# Altium PCB CPU-V4e_antenna_2.PcbDoc
Units mil, origin at the board's own origin, x right, y up, seen from the top; angles counter-clockwise.
Board outline 3543.31 x 4821.53 mil, 4 copper layers (TopLayer, MidLayer1, MidLayer2, BottomLayer); 3 components, 96 nets, 40 pads, 3 vias.
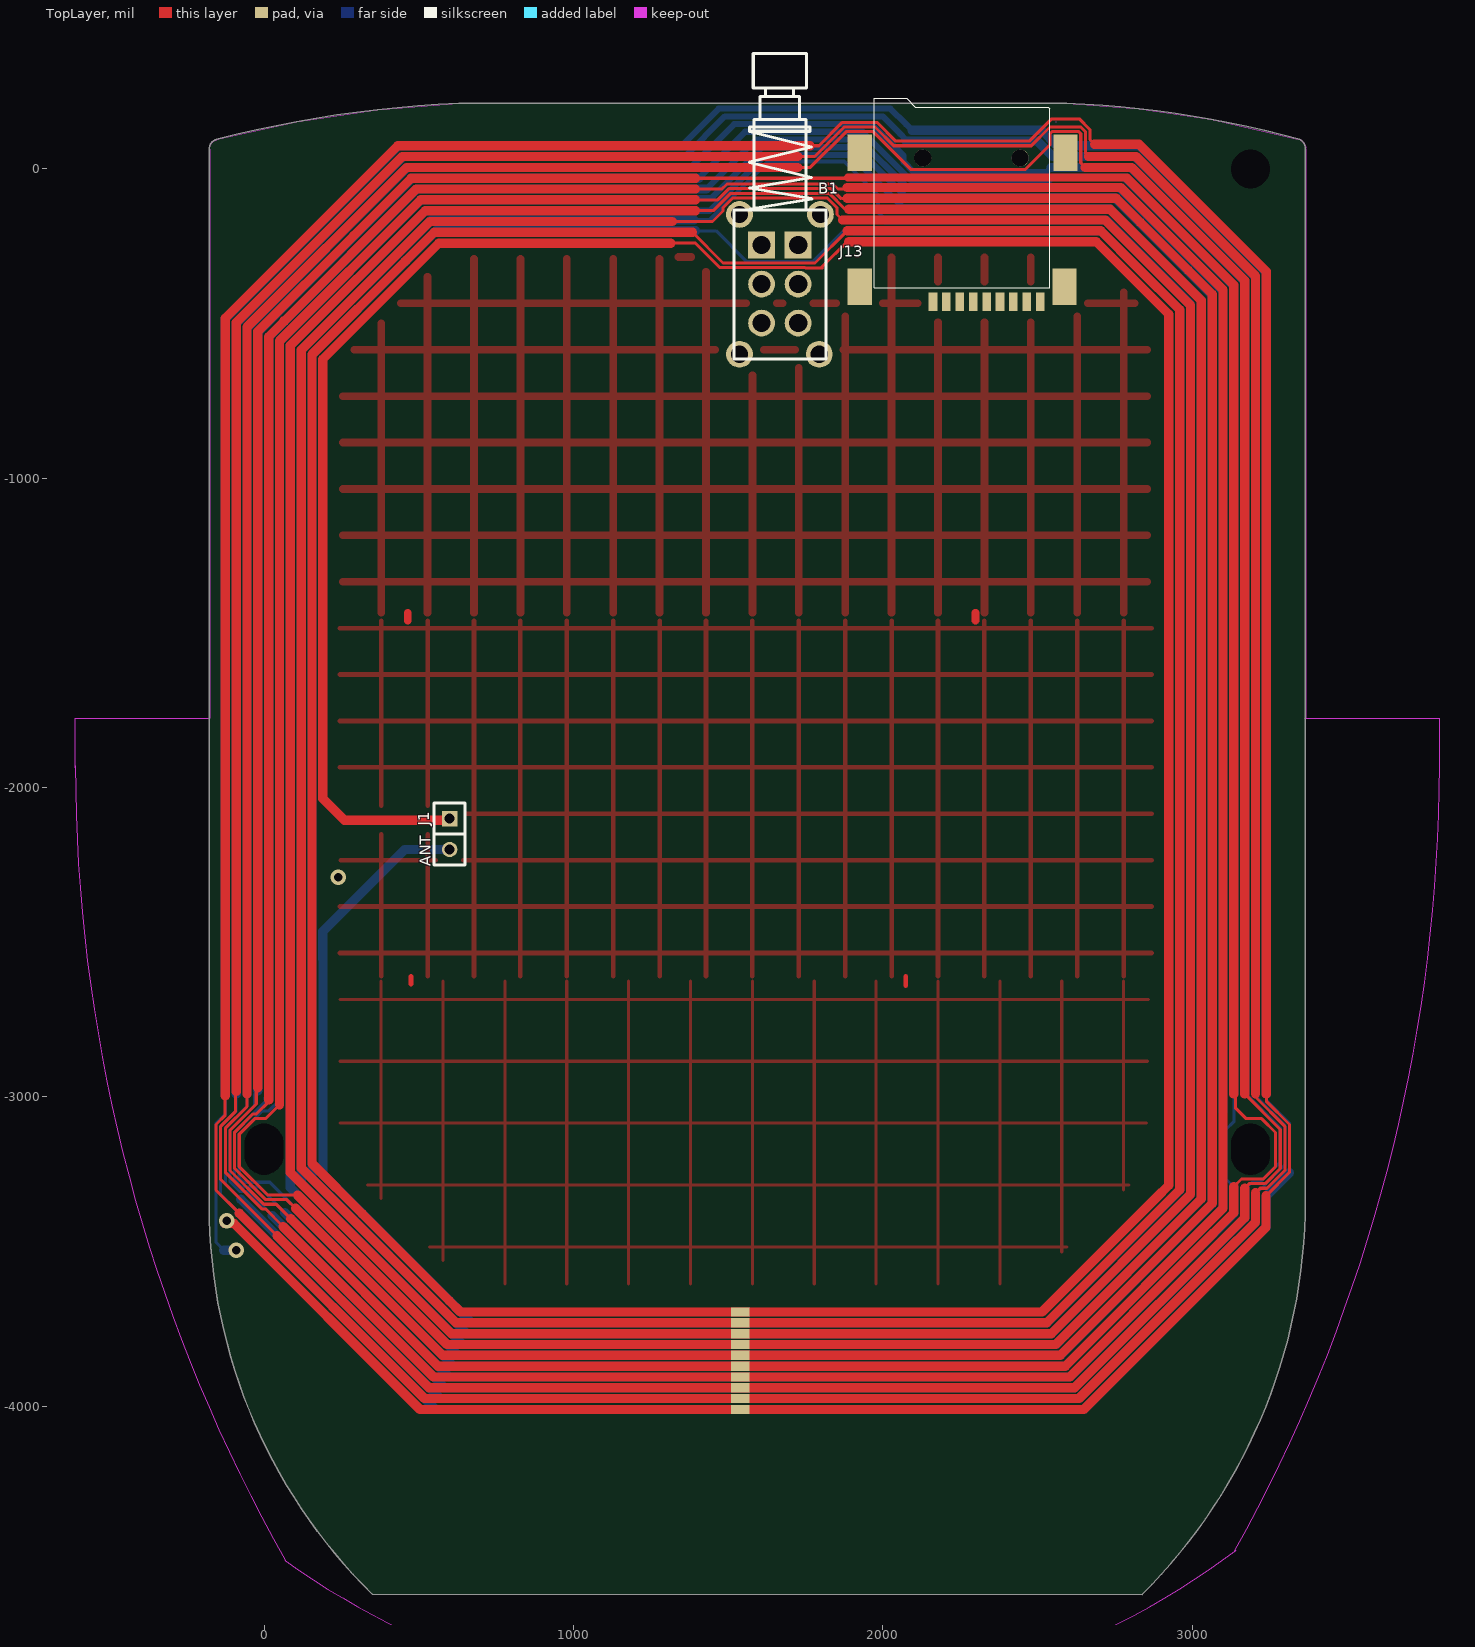
[diagram p0: TopLayer view]
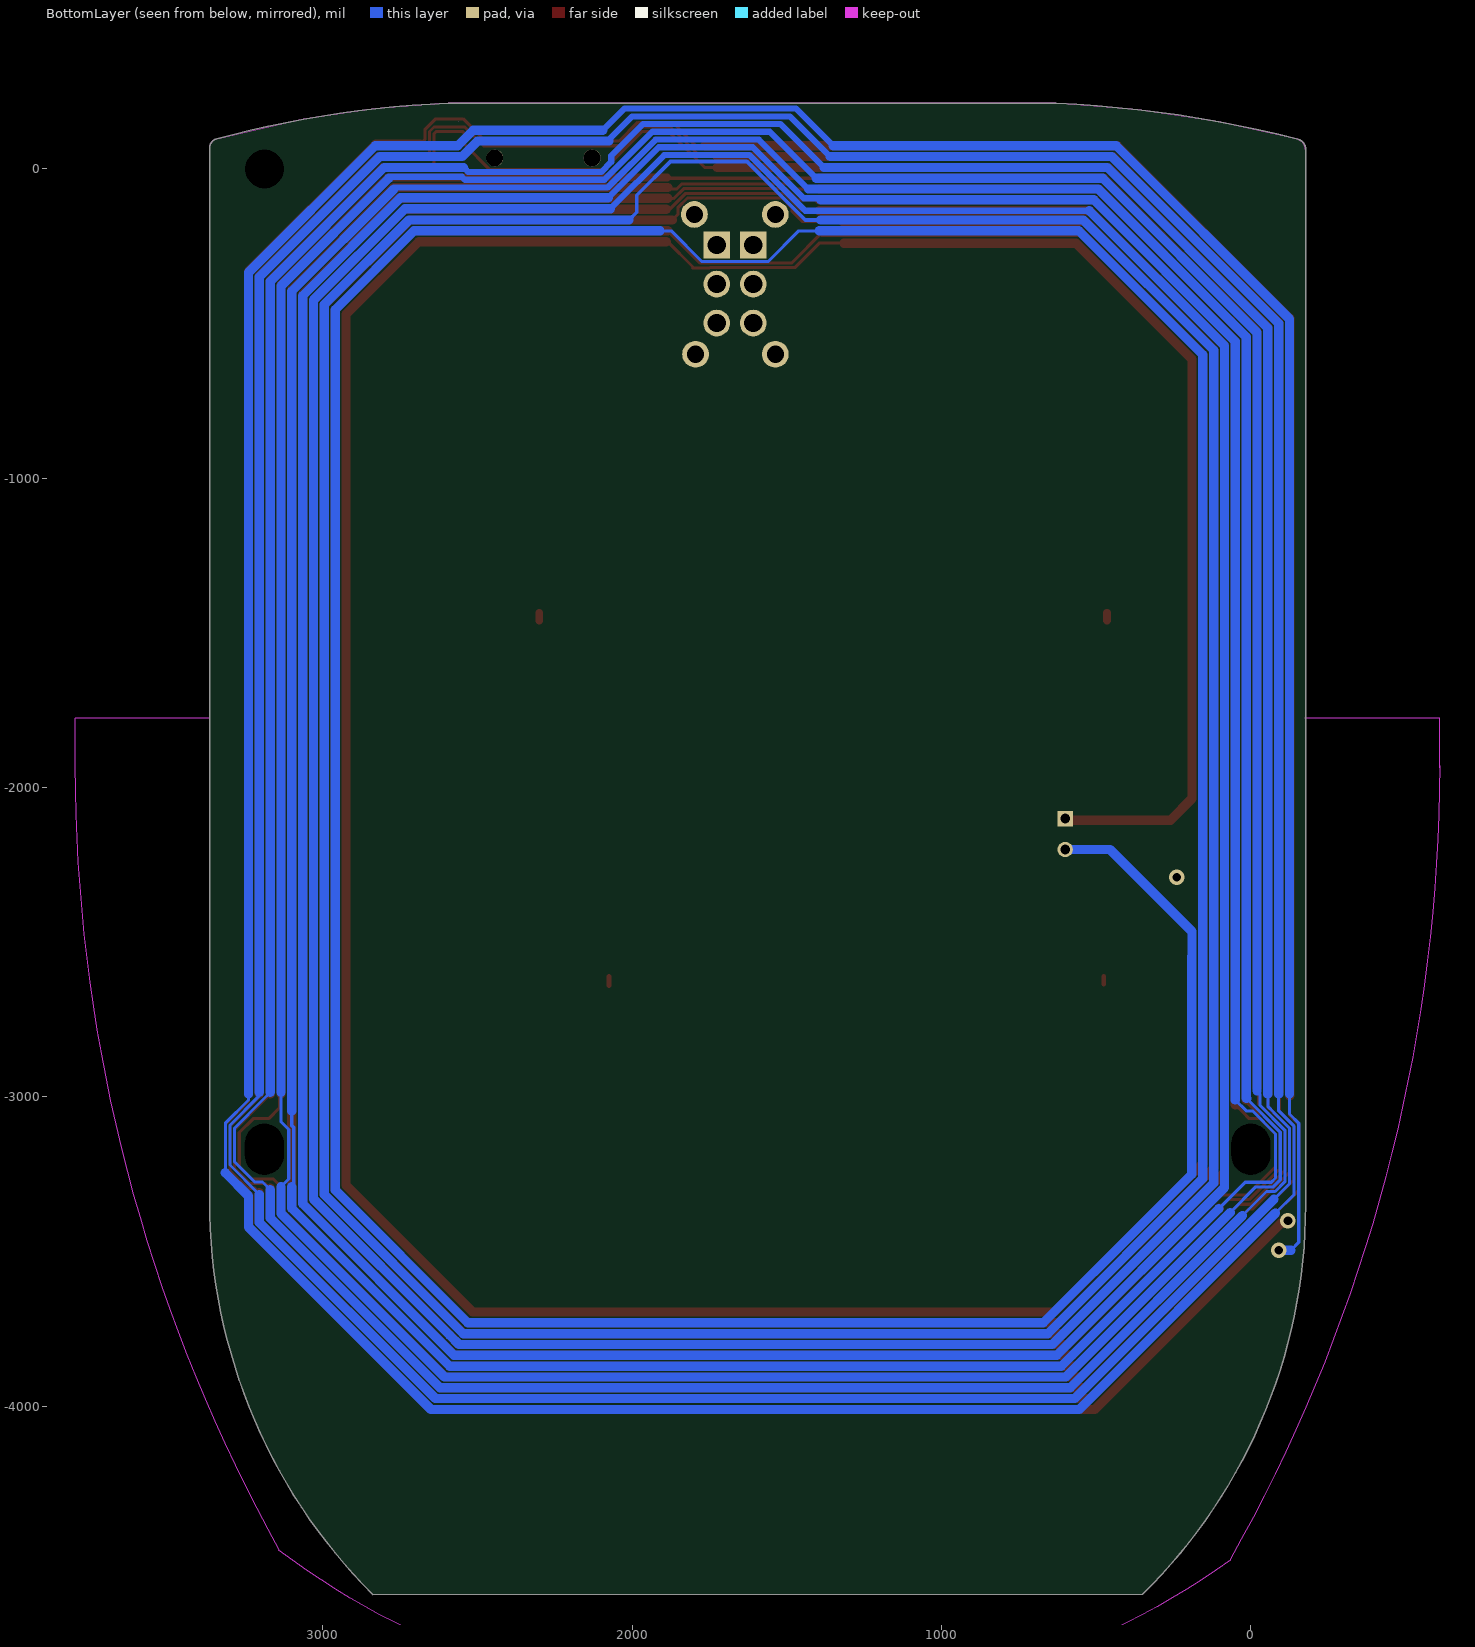
[diagram p1: BottomLayer view, seen from below]
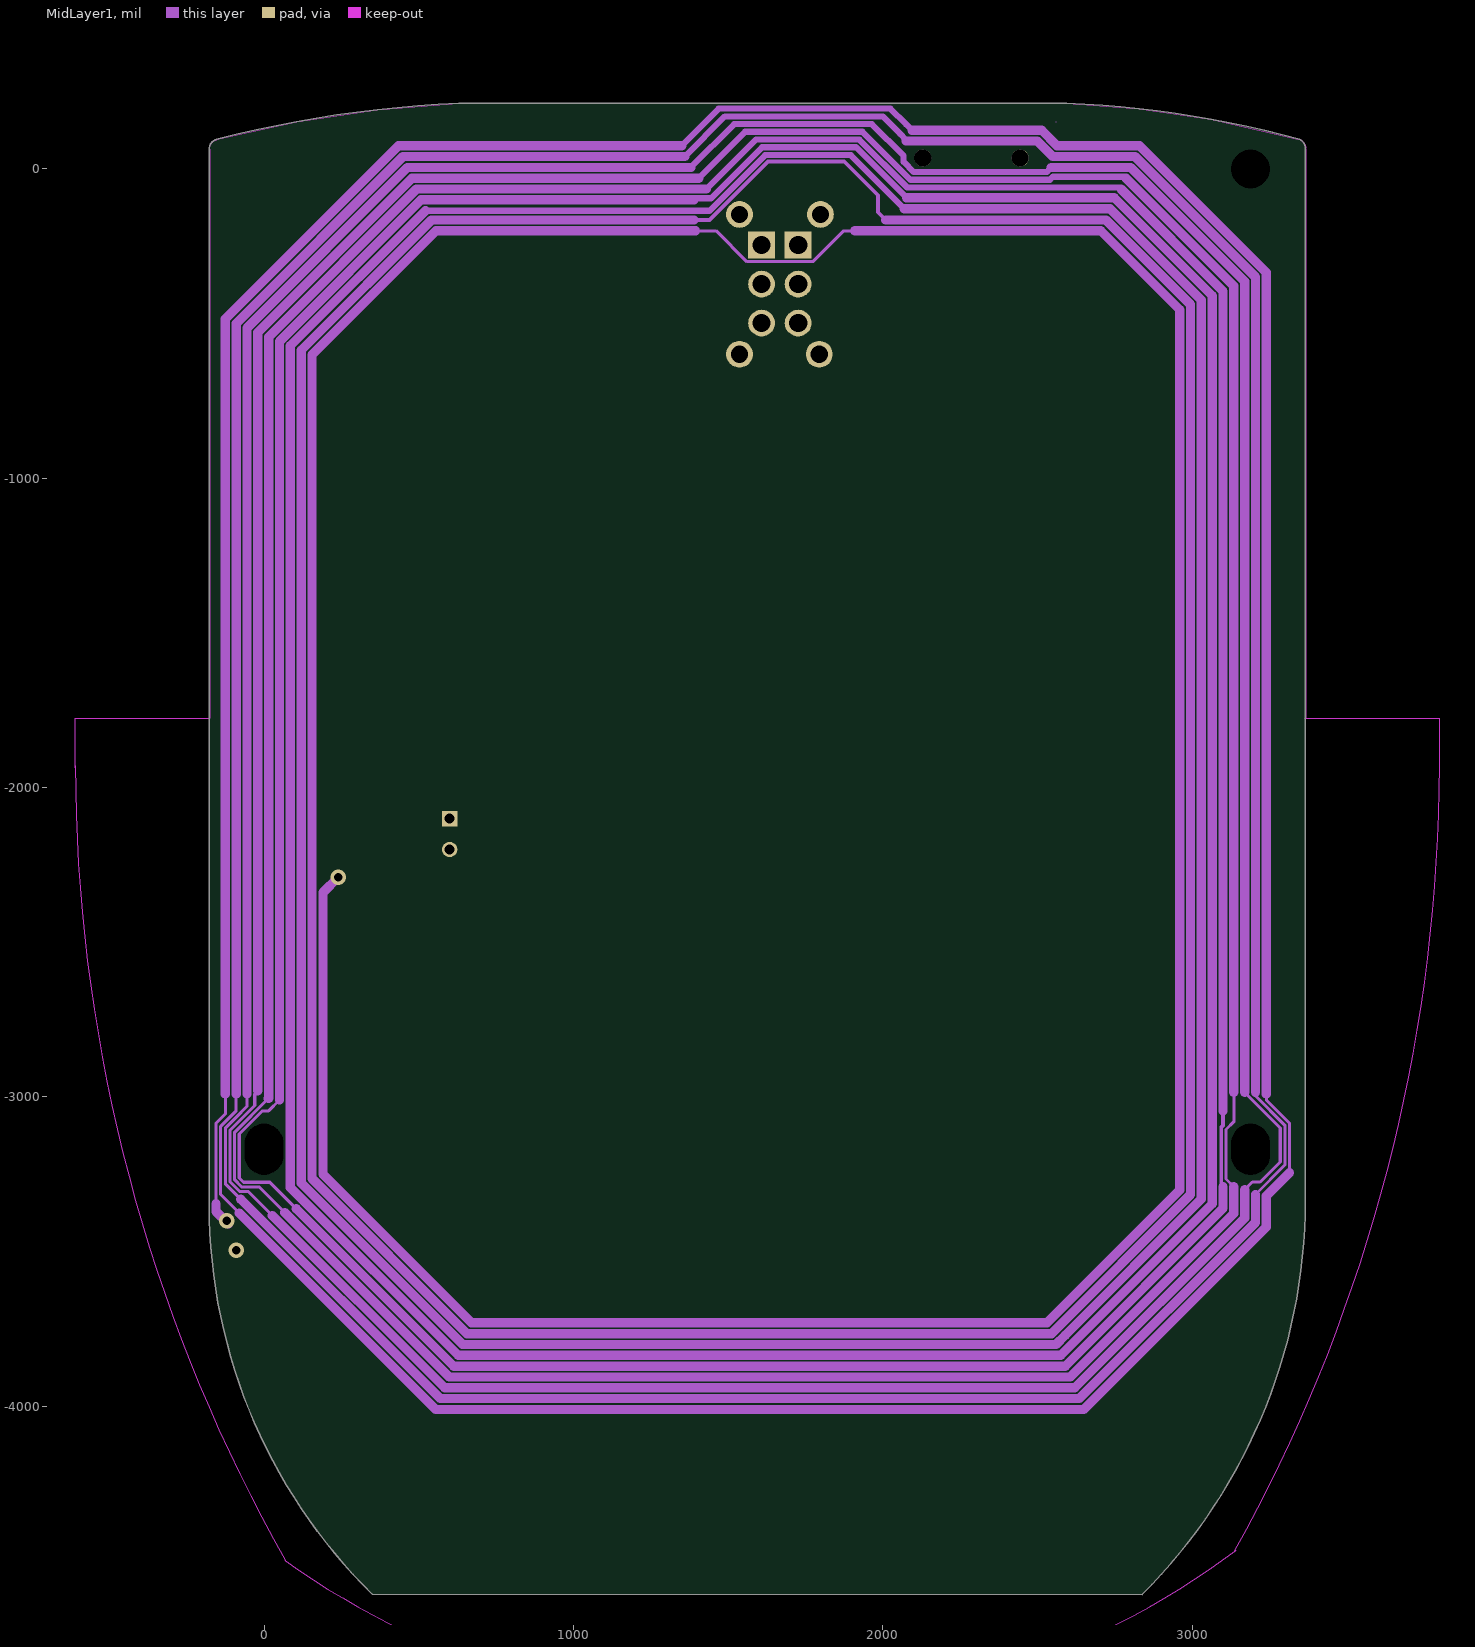
[diagram p2: MidLayer1]
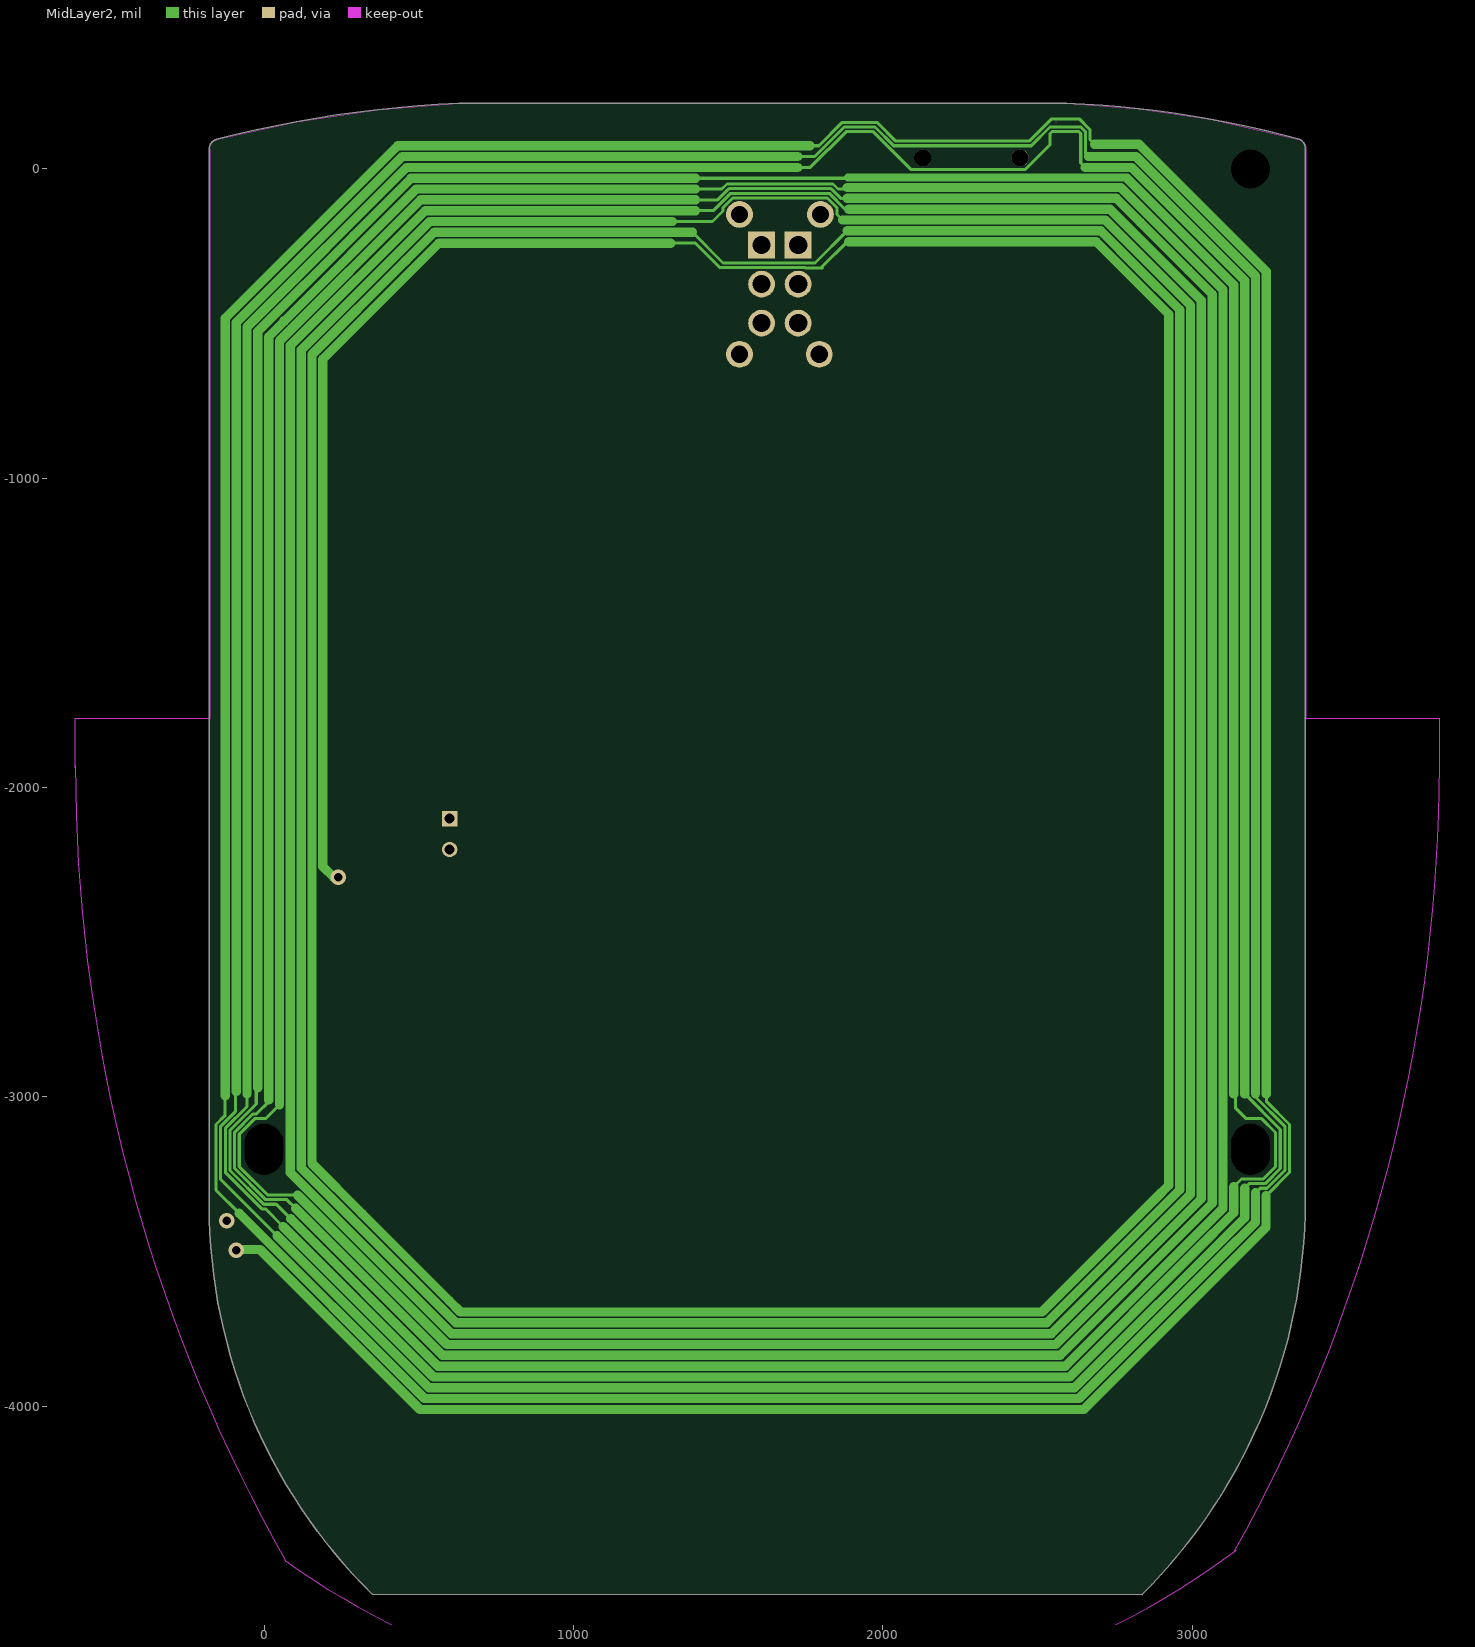
[diagram p3: MidLayer2]

## Layer stack, top to bottom
TopLayer: signal copper 1.4
Dielectric: core 12.6, FR-4, Dk 4.8
MidLayer1: signal copper 1.4
Dielectric: prepreg 12.6, FR-4, Dk 4.8
MidLayer2: signal copper 1.4
Dielectric: core 12.6, FR-4, Dk 4.8
BottomLayer: signal copper 1.4

## Board outline
350.72,-4608.17 cw(c1587.73,-3349.38) -177.13,-3349.38 -177.17,-3349.38 -177.17,65 cw(c-145.53,65) -153.52,95.61 -153.57,95.81 cw(c790.76,-3563.61) 629.02,212.23 629.02,212.6 2594,212.6 2593.9,212.64 cw(c2457.45,-3154.97) 3348.13,95.58 3348.06,95.3 cw(c3334.52,66.73) 3366.14,66.73 3366.14,-3334.62 cw(c1564.73,-3334.62) 2838.52,-4608.41 2838.52,-4608.9

## Design rules (kind name [scope] priority, off if disabled: settings)
Clearance Clearance_2 [(InPoly)] p1: gap=23.62
Clearance Clearance_1 [All] p2 off: gap=20
Clearance [All] p3: gap=5
ComponentClearance [All] p1 off: gap=10 collisioncheckmode=3 verticalgap=10 showdistances=FALSE
FabricationTestPointUsage TestPointUsage [All] p1: valid=0 allowmultiple=FALSE
FabricationTestpoint Testpoint [All] p1 off: side=3 testpointundercomponent=TRUE minsize=40 maxsize=100 preferedsize=60 minholesize=20 maxholesize=40 preferedholesize=32 testpointgrid=1 allowsidetop=TRUE allowsidebottom=TRUE usegrid=TRUE gridtolerance=0.01
MinimumSolderMaskSliver [All] p1: minsoldermaskwidth=0
PlaneClearance PlaneClearance_1 [All] p1 off: clearance=20
PlaneClearance [All] p2: clearance=20
PolygonConnect [All] p1: connectstyle=Relief reliefconductorwidth=10 reliefentries=4 polygonreliefangle="90 Angle"
PolygonConnect PolygonConnect_1 [All] p2 off: connectstyle=Direct reliefconductorwidth=10 reliefentries=4 polygonreliefangle="90 Angle"
RoutingLayers [All] p1: top layer_v5=TRUE mid layer 1_v5=FALSE mid layer 2_v5=FALSE bottom layer_v5=TRUE
RoutingVias [All] p1: holewidth=15.75 width=31.5 viastyle="Through Hole" minholewidth=15.75 minwidth=31.5 maxholewidth=28 maxwidth=50
SilkToSilkClearance [All] p1: silktosilkclearance=0
SilkscreenOverComponentPads [All] p1: minsilkscreentomaskgap=0
SolderMaskExpansion [All] p1: expansion=4
Width [All] p1: maxlimit=393.7 minlimit=3.94 preferedwidth=39.37
20 further rules are at their usual default settings.

## Components (designator, comment, footprint, x,y, rotation, side; value= is the part's Value field where it differs from the comment)
B1 "ON/OFF" KGPS22F03 1608.49,-246.22 r0 top locked
J1 "ANT" sip2 600,-2100 r270 top (schematic designator J15)
J13 "micro SD" MICRO_SD 2258.09,-69.06 r270 top locked

## Footprints (in the part's own frame and the unit in brackets; to place one, negate y for a bottom-side part, rotate by r counter-clockwise, add the part's x,y. Pads: shape width x height; smd on the part's side, far side on the other; paste and mask are expansions set on the pad)
KGPS22F03 [mm]
  round 2.2 hole 1.4: 0(-1.813,-8.962) 0(-1.813,2.518) 0(4.733,-8.962) 0(4.834,2.518)
  rect 2.2x2.2 hole 1.5 unplated: 1(0,0) 6(3,0)
  round 2.2 hole 1.5: 2(0,-3.2) 3(0,-6.4) 4(3,-6.4) 5(3,-3.2)
  silkscreen extent -2.26,-9.35 5.29,15.75, body extent -1.81,-9 4.83,15.7, height 9
MICRO_SD [mm]
  rect 3x2 smd: 0(-3.064,8.45) 0(-3.064,-8.45) 0(7.935,8.374) 0(7.935,-8.45)
  round 1.4 hole 1.4: 0(-2.652,4.732) 1(-2.652,-3.268)
  rect 1.5x0.7 smd: 1(9.16,-2.425) 2(9.16,-1.326) 3(9.16,-0.226) 4(9.16,0.874) 5(9.16,1.974) 6(9.16,3.074) 7(9.16,4.174) 8(9.16,5.275) 9(9.16,6.374)
  silkscreen extent -7.54,-7.24 8.01,7.17, body extent -11.45,-7.24 8.05,7.16, height 4
sip2 [mil]
  rect 50x50 hole 32: 1(0,0)
  round 50 hole 32: 2(100,0)
  silkscreen extent -50,-50 150,50

## Part data
B1: library part Component_1
J1: library part "Header 2", "Header, 2-Pin"
J13: library part "JJ TRANSFLASH", "Transflash Socket"

## Free pads (board coordinates)
  round 60 hole 125.98 slot 165.35 at 90 deg: 2(0,-3169.29) 2(3188.98,-3169.29)
  round 60 hole 125.98: 2(3188.98,0)
  rect 60x30 smd: 4(1540,-4010) 4(1540,-3975) 4(1540,-3940) 4(1540,-3905) 4(1540,-3870) 4(1540,-3835) 4(1540,-3800) 4(1540,-3765) 4(1540,-3730) 4(1540,-3695)

## Via types
v1: diameter 50, hole 28, TopLayer to BottomLayer, 3 vias

## Nets (pads, with @x,y where several pads share a name; then routed paths per layer and width w, separated by ;. In a path a pad name is that pad's centre, name@x,y a point inside that pad or via, vN(x,y) a via of type N, cw(c..) or ccw(c..) an arc to the next point about the centre after c; other vN are vias at no path point)
A0: 
A1: 
A2: 
A3: 
A4: 
A5: 
A6: 
A7: 
AREF: 
B: 
BLUE: 
CS1: 
D0: 
D1: 
D3: 
D5: 
D6: 
D7: 
D8: 
D9: 
D10: 
D11: 
D12: 
D13: 
D14: 
D15: 
D16: 
D17: 
D18: 
D19: 
D20: 
D21: 
D22: 
D23: 
DTR: 
E1: 
E2: 
G: 
GND: 
GND_BAT: 
NetC3_2: 
NetC4_2: 
NetC6_2: 
NetC9_1: 
NetC9_2: 
NetC10_2: 
NetC11_2: 
NetC12_1: 
NetC13_2: 
NetC14_1: 
NetC14_2: 
NetC20_2: 
NetC21_2: 
NetC29_2: 
NetC30_1: 
NetC30_2: 
NetC34_2: 
NetCm1_1: 
NetCm1_2: 
NetCm2_1: 
NetCm2_2: 
NetD3_2: 
NetD4_2: 
NetD5_2: 
NetD6_2: 
NetD13_1: 
NetD21_2: 
NetD22_2: 
NetJ2_2: 
NetJ13_2: 
NetJ13_3: 
NetJ13_5: 
NetJ14_7: 
NetR1_1: 
NetR1_2: 
NetR3_1: 
NetR11_1: 
NetR16_2: 
NetR21_1: 
NetR21_2: 
NetR28_2: 
NetR42_1: 
NetR42_2: 
NetR45_1: 
NetR47_1: 
NetR48_1: 
NetRf1_2: 
NetRprog_2: 
R: 
RESET: 
V3: 
VB: 
VBAT: 
VBOOST: 
VCC: 
VUSB: 
pads on no net: B1.0 B1.1 B1.2 B1.3 B1.4 B1.5 B1.6 J1.1 J1.2 J13.0 J13.1 J13.2 J13.3 J13.4 J13.5 J13.6 J13.7 J13.8 J13.9
copper on no net: | length 487906.4
  TopLayer w10: -125.61,-2995.61 -125.61,-3059.39 -155,-3088.79 -155,-3300.98 -80,-3375.98 ; -92.5,-2985 -92.5,-3047.5 -140,-3095 -140,-3266.48 41.76,-3448.24 ; -55,-2990 -55,-3031.36 -125,-3101.36 -125,-3243.64 -6.89,-3361.75 4.76,-3361.75 61.51,-3418.49 ; -25,-2970 -25,-3005 -25,-3022.57 -51.21,-3048.79 -110,-3107.57 -110,-3237.43 -0.68,-3346.75 39.26,-3346.75 86.26,-3393.74 ; 15,-3015 -25,-3055 -36.21,-3055 -95,-3113.79 -95,-3231.21 5.53,-3331.75 73.76,-3331.75 102.01,-3360 ; 50,-3025 25,-3050 5,-3070 -30,-3070 -80,-3120 -80,-3146.25 -80,-3225 11.75,-3316.75 108.25,-3316.75 ; 1315,-240 1395,-240 1473.9,-318.9 1748.68,-318.9 1749.78,-320 1800,-320 ; 1320,-170 1450,-170 1483.82,-136.18 1483.82,-125.03 1515.05,-93.8 1820.87,-93.8 1852.09,-125.03 1852.09,-147.09 1870,-165 ; 1375,-30 1885,-30 ; 1385,-205 1483.9,-303.9 1771.1,-303.9 1781.1,-303.9 1885,-200 ; 1395,-135 1452.63,-135 1508.83,-78.8 1827.08,-78.8 1878.28,-130 ; 1395,-100 1466.42,-100 1502.62,-63.8 1833.29,-63.8 1864.5,-95 ; 1395,-65 1480.21,-65 1496.41,-48.8 1839.51,-48.8 1855.71,-65 1900,-65 ; 1725,5 1766.28,5 1881.92,120.65 1968.95,120.65 2091.8,-2.2 2459.95,-2.2 2541.38,79.23 2541.38,114.79 2547.24,120.65 2634.26,120.65 2640.12,114.79 2640.12,19.88 2655,5 ; 1725,40 1780.06,40 1875.71,135.65 1975.16,135.65 2035.81,75 2480.38,75 2541.03,135.65 2640.48,135.65 2655.12,121 2655.12,50 2665,40.12 ; 1765,75 1793.85,75 1869.5,150.65 1981.38,150.65 2042.02,90 2474.17,90 2546.25,162.09 2635.25,162.09 2670.12,127.22 2670.12,94.88 2685,80 ; 1805,-320 1800,-320 ; 1870,-95 1885,-95 ; 1890,-230 1800,-320 ; 3135,-3290 3160,-3265 3230,-3265 3270,-3225 3270,-3115 3225,-3070 3175,-3070 3140,-3035 3140,-2995 3135,-2990 ; 3170,-3295 3185,-3280 3236.21,-3280 3285,-3231.21 3285,-3105 3170,-2990 ; 3205,-3310 3220,-3295 3242.43,-3295 3300,-3237.43 3300,-3095 3205,-3000 3205,-2989.64 ; 3239.32,-3319.32 3315,-3243.64 3315,-3088.79 3240,-3013.79 3240,-2990
  TopLayer w15: 475,-2635 475,-2610 ; 2075,-2640 2075,-2610
  TopLayer w25: 465,-1460 465,-1435 ; 1887.5,-27.5 1910,-27.5 2790,-27.5 ; 2300,-1460 2300,-1435
  TopLayer w30: v1@-127.74,-3407.74 -97.74,-3407.74 504.52,-4010 2650,-4010 3239.32,-3420.68 3239.32,-3385 3239.32,-3319.32 ; -125.61,-2995.61 -125.61,-482.62 432.01,75 1725,75 1765,75 ; -90,-2982.5 -90,-496.51 330,-76.51 446.51,40 1725,40 ; -80,-3375.98 519.02,-3975 2634.5,-3975 3092.25,-3517.25 3205,-3404.5 3205,-3310 ; -55,-2990 -55,-511.01 461.01,5 1725,5 ; -20,-2970 -20,-525.5 290,-215.5 475.5,-30 1375,-30 1395,-30 ; 15,-3010 15,-542.01 65,-492.01 ; 41.76,-3448.24 533.52,-3940 2620,-3940 3170,-3390 3170,-3295 ; 50,-3025 50,-556.51 506.51,-100 1395,-100 ; 61.51,-3418.49 548.02,-3905 2604.5,-3905 3009.75,-3499.75 3135,-3374.5 3135,-3290 ; 65,-490 65,-492.01 ; 86.26,-3393.74 562.51,-3870 2590,-3870 3100,-3360 3100,-695 3100,-390.5 2769.5,-60 1885,-60 ; 102.01,-3360 577.01,-3835 2573.49,-3835 3065,-3343.49 3065,-405 2987.5,-327.5 2832.5,-172.5 2755,-95 1885,-95 ; 108.25,-3316.75 591.51,-3800 2558.99,-3800 3030,-3328.99 3030,-425 2735,-130 2685,-130 1890,-130 ; 460,-295 455,-300 ; 580,-2105 265,-2105 260,-2105 190,-2035 190,-615 565,-240 1075,-240 1090,-240 1315,-240 ; 1320,-170 535.5,-170 120,-585.5 120,-3229.5 620.5,-3730 2530,-3730 2960,-3300 2960,-455.5 2824.5,-320 2704.5,-200 1885,-200 ; 1385,-205 1215,-205 550,-205 455,-300 ; 1395,-135 710,-135 521.01,-135 85,-571.01 85,-3243.99 606.01,-3765 2544.5,-3765 2995,-3314.5 2995,-441.01 2718.99,-165 1870,-165 ; 1395,-65 492.01,-65 65,-492.01 ; 1890,-235 2690,-235 2925,-470 2925,-3285 2885,-3325 2515,-3695 635,-3695 599.04,-3659.04 317.5,-3377.5 155,-3215 155,-600 455,-300 ; 2655,5 2804.5,5 3170,-360.5 3170,-2990 ; 2665,40.12 2665.12,40 2818.99,40 3205,-346.01 3205,-2989.64 ; 2685,80 2828.49,80 3240,-331.51 3240,-2990 ; 2790,-30 2811.73,-51.73 3135,-375 3135,-2990
  MidLayer1 w10: -155,-3345 -155,-3305 -155,-3085 -125,-3055 -125,-2990 ; -90,-2990 -90,-3045 -140,-3095 -140,-3315 -80,-3375 ; -75,-3330.5 -125,-3280.5 -125,-3101.21 -75,-3051.21 -75,-3050 -55,-3030 -55,-2990 ; -20,-2980 -30,-2990 -30,-3027.43 -110,-3107.43 -110,-3274.29 -78.79,-3305.5 -50.5,-3305.5 27,-3383 ; 13.64,-3005 -95,-3113.64 -95,-3268.08 -72.57,-3290.5 -16.01,-3290.5 66.75,-3373.25 ; 50,-3010 15,-3045 -5.15,-3045 -80,-3119.85 -80,-3261.86 -66.36,-3275.5 18.49,-3275.5 103.99,-3361.01 ; 1395,-200 1461.51,-200 1561.04,-299.53 1774.05,-299.53 1873.58,-200 1910,-200 ; 3135,-3290 3110,-3265 3110,-3105 3135,-3080 3135,-2985 ; 3170,-3300 3195,-3275 3220,-3275 3285,-3210 3285,-3100 3195,-3010 3194.64,-3010 3170,-2985.36 3170,-2985 ; 3205,-3315 3300,-3220 3300,-3215 3300,-3091.21 3205,-2996.21 3205,-2985 ; 3240,-2990 3240,-3010 3315,-3085 3315,-3245
  MidLayer1 w12: 1390,-165 1440.05,-165 1629.05,24 1876,24 1985,-85 1985,-135 1985,-140 2010,-165 ; 3100,-3290 3100,-3283.63 3094,-3277.63 3094,-3098.37 3100,-3092.37 3100,-3045
  MidLayer1 w20: 521.98,-135 1440.36,-135 1620.36,45 1896.51,45 2070,-128.49 ; 1350,75 1470,195 2025,195 2076.29,143.71 2095,125 ; 1360,40 1490,170 2000,170 2056.29,113.71 2075,95 ; 1380,5 1520,145 1965,145 2067.5,42.5 2067.5,22.5 2100,-10 2530,-10 2540,0 ; 1390,-100 1395,-95 1445,-95 1610,70 1913.93,70 2076.97,-93.03 ; 1405,-30 1555,120 1934.64,120 2089.64,-35 2540.36,-35 2550.36,-25 2735,-25 2780,-25 ; 1430,-65 1590,95 1924.29,95 2079.29,-60 2735,-60 2765,-60
  MidLayer1 w30: -155,-3345 -155,-3370 v1@-115,-3410 ; -125,-2990 -125,-485 435,75 1350,75 ; -90,-2990 -90,-499.5 449.5,40 1360,40 ; -80,-3375 555,-4010 2650,-4010 3240,-3420 3240,-3320 3315,-3245 ; -75,-3330.5 569.5,-3975 2635.5,-3975 3205,-3405.5 3205,-3315 ; -55,-2990 -55,-513.99 463.99,5 1380,5 ; -20,-2980 -20,-528.49 478.49,-30 1405,-30 ; 13.64,-3005 15,-3003.64 15,-542.99 492.99,-65 1395,-65 1430,-65 ; 27,-3383 583.99,-3940 2621.01,-3940 3170,-3391.01 3170,-3300 ; 50,-3010 50,-557.49 507.49,-100 1390,-100 ; 66.75,-3373.25 598.49,-3905 2606.51,-3905 3135,-3376.51 3135,-3290 ; 103.99,-3361.01 612.99,-3870 2590,-3870 3100,-3360 3100,-3290 ; v1(240,-2290) 190.98,-2339.02 190.98,-3250 350.49,-3409.51 670.98,-3730 2531.01,-3730 2960,-3301.01 2960,-455 2705,-200 1910,-200 ; 521.98,-135 85,-571.98 85,-3292.51 627.49,-3835 2575.5,-3835 3065,-3345.5 3065,-605 3065,-409.5 2748.54,-93.03 2076.97,-93.03 ; 1390,-165 541.48,-165 120,-586.48 120,-3278.02 641.98,-3800 2560,-3800 2590,-3770 3030,-3330 3030,-423.99 2734.5,-128.49 2070,-128.49 ; 1395,-200 555.98,-200 155,-600.98 155,-3263.52 656.48,-3765 2545.5,-3765 2995,-3315.5 2995,-438.49 2721.51,-165 2010,-165 ; 2075,90 2499.25,90 2549.25,40 2815.5,40 3205,-349.5 3205,-2985 ; 2095,125 2513.75,125 2563.75,75 2830,75 3240,-335 3240,-2990 ; 2545,5 2800,5 ; 2770,-65 3100,-395 3100,-3045 ; 2786.51,-30 3135,-378.49 3135,-2985 ; 2801.01,5 3170,-363.99 3170,-2985
  MidLayer2 w10: -125.61,-2995.61 -125.61,-3059.39 -155,-3088.79 -155,-3300.98 -80,-3375.98 ; -92.5,-2985 -92.5,-3047.5 -140,-3095 -140,-3266.48 41.76,-3448.24 ; -55,-2990 -55,-3031.36 -125,-3101.36 -125,-3243.64 -6.89,-3361.75 4.76,-3361.75 61.51,-3418.49 ; -25,-2970 -25,-3005 -25,-3022.57 -51.21,-3048.79 -110,-3107.57 -110,-3237.43 -0.68,-3346.75 39.26,-3346.75 86.26,-3393.74 ; 15,-3015 -25,-3055 -36.21,-3055 -95,-3113.79 -95,-3231.21 5.53,-3331.75 73.76,-3331.75 102.01,-3360 ; 50,-3025 25,-3050 5,-3070 -30,-3070 -80,-3120 -80,-3146.25 -80,-3225 11.75,-3316.75 108.25,-3316.75 ; 1315,-240 1395,-240 1473.9,-318.9 1748.68,-318.9 1749.78,-320 1800,-320 ; 1320,-170 1450,-170 1483.82,-136.18 1483.82,-125.03 1515.05,-93.8 1820.87,-93.8 1852.09,-125.03 1852.09,-147.09 1870,-165 ; 1375,-30 1885,-30 ; 1385,-205 1483.9,-303.9 1771.1,-303.9 1781.1,-303.9 1885,-200 ; 1395,-135 1452.63,-135 1508.83,-78.8 1827.08,-78.8 1878.28,-130 ; 1395,-100 1466.42,-100 1502.62,-63.8 1833.29,-63.8 1864.5,-95 ; 1395,-65 1480.21,-65 1496.41,-48.8 1839.51,-48.8 1855.71,-65 1900,-65 ; 1725,5 1766.28,5 1881.92,120.65 1968.95,120.65 2091.8,-2.2 2459.95,-2.2 2541.38,79.23 2541.38,114.79 2547.24,120.65 2634.26,120.65 2640.12,114.79 2640.12,19.88 2655,5 ; 1725,40 1780.06,40 1875.71,135.65 1975.16,135.65 2035.81,75 2480.38,75 2541.03,135.65 2640.48,135.65 2655.12,121 2655.12,50 2665,40.12 ; 1765,75 1793.85,75 1869.5,150.65 1981.38,150.65 2042.02,90 2474.17,90 2546.25,162.09 2635.25,162.09 2670.12,127.22 2670.12,94.88 2685,80 ; 1805,-320 1800,-320 ; 1870,-95 1885,-95 ; 1890,-230 1800,-320 ; 3135,-3290 3160,-3265 3230,-3265 3270,-3225 3270,-3115 3225,-3070 3175,-3070 3140,-3035 3140,-2995 3135,-2990 ; 3170,-3295 3185,-3280 3236.21,-3280 3285,-3231.21 3285,-3105 3170,-2990 ; 3205,-3310 3220,-3295 3242.43,-3295 3300,-3237.43 3300,-3095 3205,-3000 3205,-2989.64 ; 3239.32,-3319.32 3315,-3243.64 3315,-3088.79 3240,-3013.79 3240,-2990
  MidLayer2 w25: 1887.5,-27.5 1910,-27.5 2790,-27.5
  MidLayer2 w30: -125.61,-2995.61 -125.61,-482.62 432.01,75 1725,75 1765,75 ; v1(-90,-3495) -87.74,-3492.74 -12.74,-3492.74 504.52,-4010 2650,-4010 3239.32,-3420.68 3239.32,-3385 3239.32,-3319.32 ; -90,-2982.5 -90,-496.51 330,-76.51 446.51,40 1725,40 ; -80,-3375.98 519.02,-3975 2634.5,-3975 3092.25,-3517.25 3205,-3404.5 3205,-3310 ; -55,-2990 -55,-511.01 461.01,5 1725,5 ; -20,-2970 -20,-525.5 290,-215.5 475.5,-30 1375,-30 1395,-30 ; 15,-3010 15,-542.01 65,-492.01 ; 41.76,-3448.24 533.52,-3940 2620,-3940 3170,-3390 3170,-3295 ; 50,-3025 50,-556.51 506.51,-100 1395,-100 ; 61.51,-3418.49 548.02,-3905 2604.5,-3905 3009.75,-3499.75 3135,-3374.5 3135,-3290 ; 65,-490 65,-492.01 ; 86.26,-3393.74 562.51,-3870 2590,-3870 3100,-3360 3100,-695 3100,-390.5 2769.5,-60 1885,-60 ; 102.01,-3360 577.01,-3835 2573.49,-3835 3065,-3343.49 3065,-405 2987.5,-327.5 2832.5,-172.5 2755,-95 1885,-95 ; 108.25,-3316.75 591.51,-3800 2558.99,-3800 3030,-3328.99 3030,-425 2735,-130 2685,-130 1890,-130 ; 190,-2035 190,-615 565,-240 1075,-240 1090,-240 1315,-240 ; 190,-2000 190,-2255 225,-2290 v1(240,-2290) ; 460,-295 455,-300 ; 1320,-170 535.5,-170 120,-585.5 120,-3229.5 620.5,-3730 2530,-3730 2960,-3300 2960,-455.5 2824.5,-320 2704.5,-200 1885,-200 ; 1385,-205 1215,-205 550,-205 455,-300 ; 1395,-135 710,-135 521.01,-135 85,-571.01 85,-3243.99 606.01,-3765 2544.5,-3765 2995,-3314.5 2995,-441.01 2718.99,-165 1870,-165 ; 1395,-65 492.01,-65 65,-492.01 ; 1890,-235 2690,-235 2925,-470 2925,-3285 2885,-3325 2515,-3695 635,-3695 599.04,-3659.04 317.5,-3377.5 155,-3215 155,-600 455,-300 ; 2655,5 2804.5,5 3170,-360.5 3170,-2990 ; 2665,40.12 2665.12,40 2818.99,40 3205,-346.01 3205,-2989.64 ; 2685,80 2828.49,80 3240,-331.51 3240,-2990 ; 2790,-30 2811.73,-51.73 3135,-375 3135,-2990
  BottomLayer w10: -155,-3350 -155,-3470 -130,-3495 ; -155,-3345 -155,-3305 -155,-3085 -125,-3055 -125,-2990 ; -90,-2990 -90,-3045 -140,-3095 -140,-3315 -80,-3375 ; -75,-3330.5 -125,-3280.5 -125,-3101.21 -75,-3051.21 -75,-3050 -55,-3030 -55,-2990 ; -20,-2980 -30,-2990 -30,-3027.43 -110,-3107.43 -110,-3274.29 -78.79,-3305.5 -50.5,-3305.5 27,-3383 ; 13.64,-3005 -95,-3113.64 -95,-3268.08 -72.57,-3290.5 -16.01,-3290.5 66.75,-3373.25 ; 50,-3010 15,-3045 -5.15,-3045 -80,-3119.85 -80,-3261.86 -66.36,-3275.5 18.49,-3275.5 103.99,-3361.01 ; 1395,-200 1461.51,-200 1561.04,-299.53 1774.05,-299.53 1873.58,-200 1910,-200 ; 3135,-3290 3110,-3265 3110,-3105 3135,-3080 3135,-2985 ; 3170,-3300 3195,-3275 3220,-3275 3285,-3210 3285,-3100 3195,-3010 3194.64,-3010 3170,-2985.36 3170,-2985 ; 3205,-3315 3300,-3220 3300,-3215 3300,-3091.21 3205,-2996.21 3205,-2985 ; 3240,-2990 3240,-3010 3315,-3085 3315,-3245
  BottomLayer w12: 1390,-165 1440.05,-165 1629.05,24 1876,24 1985,-85 1985,-135 1985,-140 2010,-165 ; 3100,-3290 3100,-3283.63 3094,-3277.63 3094,-3098.37 3100,-3092.37 3100,-3045
  BottomLayer w20: 521.98,-135 1440.36,-135 1620.36,45 1896.51,45 2070,-128.49 ; 1350,75 1470,195 2025,195 2076.29,143.71 2095,125 ; 1360,40 1490,170 2000,170 2056.29,113.71 2075,95 ; 1380,5 1520,145 1965,145 2067.5,42.5 2067.5,22.5 2100,-10 2530,-10 2540,0 ; 1390,-100 1395,-95 1445,-95 1610,70 1913.93,70 2076.97,-93.03 ; 1405,-30 1555,120 1934.64,120 2089.64,-35 2540.36,-35 2550.36,-25 2735,-25 2780,-25 ; 1430,-65 1590,95 1924.29,95 2079.29,-60 2735,-60 2765,-60
  BottomLayer w30: -130,-3495 v1(-90,-3495) ; -125,-2990 -125,-485 435,75 1350,75 ; -90,-2990 -90,-499.5 449.5,40 1360,40 ; -80,-3375 555,-4010 2650,-4010 3240,-3420 3240,-3320 3315,-3245 ; -75,-3330.5 569.5,-3975 2635.5,-3975 3205,-3405.5 3205,-3315 ; -55,-2990 -55,-513.99 463.99,5 1380,5 ; -20,-2980 -20,-528.49 478.49,-30 1405,-30 ; 13.64,-3005 15,-3003.64 15,-542.99 492.99,-65 1395,-65 1430,-65 ; 27,-3383 583.99,-3940 2621.01,-3940 3170,-3391.01 3170,-3300 ; 50,-3010 50,-557.49 507.49,-100 1390,-100 ; 66.75,-3373.25 598.49,-3905 2606.51,-3905 3135,-3376.51 3135,-3290 ; 103.99,-3361.01 612.99,-3870 2590,-3870 3100,-3360 3100,-3290 ; 190,-2555 190,-2465 245,-2410 ; 190.98,-2545 190.98,-3250 350.49,-3409.51 670.98,-3730 2531.01,-3730 2960,-3301.01 2960,-455 2705,-200 1910,-200 ; 240,-2415 245,-2410 ; 521.98,-135 85,-571.98 85,-3292.51 627.49,-3835 2575.5,-3835 3065,-3345.5 3065,-605 3065,-409.5 2748.54,-93.03 2076.97,-93.03 ; 600,-2200 455,-2200 245,-2410 ; 1390,-165 541.48,-165 120,-586.48 120,-3278.02 641.98,-3800 2560,-3800 2590,-3770 3030,-3330 3030,-423.99 2734.5,-128.49 2070,-128.49 ; 1395,-200 555.98,-200 155,-600.98 155,-3263.52 656.48,-3765 2545.5,-3765 2995,-3315.5 2995,-438.49 2721.51,-165 2010,-165 ; 2075,90 2499.25,90 2549.25,40 2815.5,40 3205,-349.5 3205,-2985 ; 2095,125 2513.75,125 2563.75,75 2830,75 3240,-335 3240,-2990 ; 2545,5 2800,5 ; 2770,-65 3100,-395 3100,-3045 ; 2786.51,-30 3135,-378.49 3135,-2985 ; 2801.01,5 3170,-363.99 3170,-2985
  other v1: -120,-3400

## Polygon pours and split planes (outlines as drawn)
no net on TopLayer "BottomLayer-No Net" (hatched 90Degree grid 200 track 10, pour order 1002): 2860,-2630 2855,-2625 245,-2625 245,-3195 260,-3210 655,-3605 670,-3605 2455,-3605 2465,-3615 2840,-3240 2850,-3240
no net on TopLayer "BottomLayer-No Net" (hatched 90Degree grid 150 track 15, pour order 1001): 245,-1460 2870,-1460 2870,-2610 245,-2610
no net on TopLayer "BottomLayer-No Net" (hatched 90Degree grid 150 track 25, pour order 1000): 595,-275 255,-615 255,-635 255,-1430 240,-1445 250,-1435 2855,-1435 2855,-475 2655,-275

## Keep-outs
KeepOutLayer:
  lines w0: -175.93,-1775 -175.95,64.45 -175.87,66.66 -175.64,68.85 -175.26,71.03 -174.72,73.17 -174.04,75.27 -173.21,77.32 -172.24,79.3 -171.14,81.21 -169.9,83.04 -168.55,84.78 -167.07,86.42 -165.48,87.96 -163.79,89.38 -162,90.68 -160.13,91.85 -158.18,92.88 -156.16,93.78 -152.3,95.06 -152.35,95.26 105.21,152.22 366.13,191.07 630.24,211.67 630.24,212.05 2595.22,212.05 ; 2560.12,152.09 2560.22,152.05 ; 2595.12,212.09 2829.71,194.36 3062.48,160.32 3349.35,95.03 3349.28,94.75 3351.24,93.74 3353.13,92.59 3354.93,91.31 3356.63,89.91 3358.24,88.39 3359.73,86.77 3361.11,85.05 3362.36,83.23 3363.49,81.33 3364.48,79.36 3365.33,77.32 3366.03,75.23 3366.59,73.1 3367,70.93 3367.25,68.74 3367.35,66.18 ; 3367.36,-1775 3367.35,64.45
  lines w1: -610,-1935 -610,-1775 -175,-1775 ; -610,-1929.98 ccw(c4623.62,-1919.94) 68.61,-4497.3 ; 67.32,-4497.76 ccw(c1582.65,-2378.39) 3142.62,-4465.13 ; 3138.69,-4466.48 ccw(c-1433.62,-1919.94) 3800,-1929.98 ; 3365,-1775 3800,-1775 3800,-1935